# Altium PCB VCA.PcbDoc
Units mil, origin at the board's own origin, x right, y up, seen from the top; angles counter-clockwise.
Board outline 9025 x 4445 mil, 2 copper layers (Top Layer, Bottom Layer), stack 61.811 mil thick; 28 components, 20 nets, 85 pads, 5 vias.
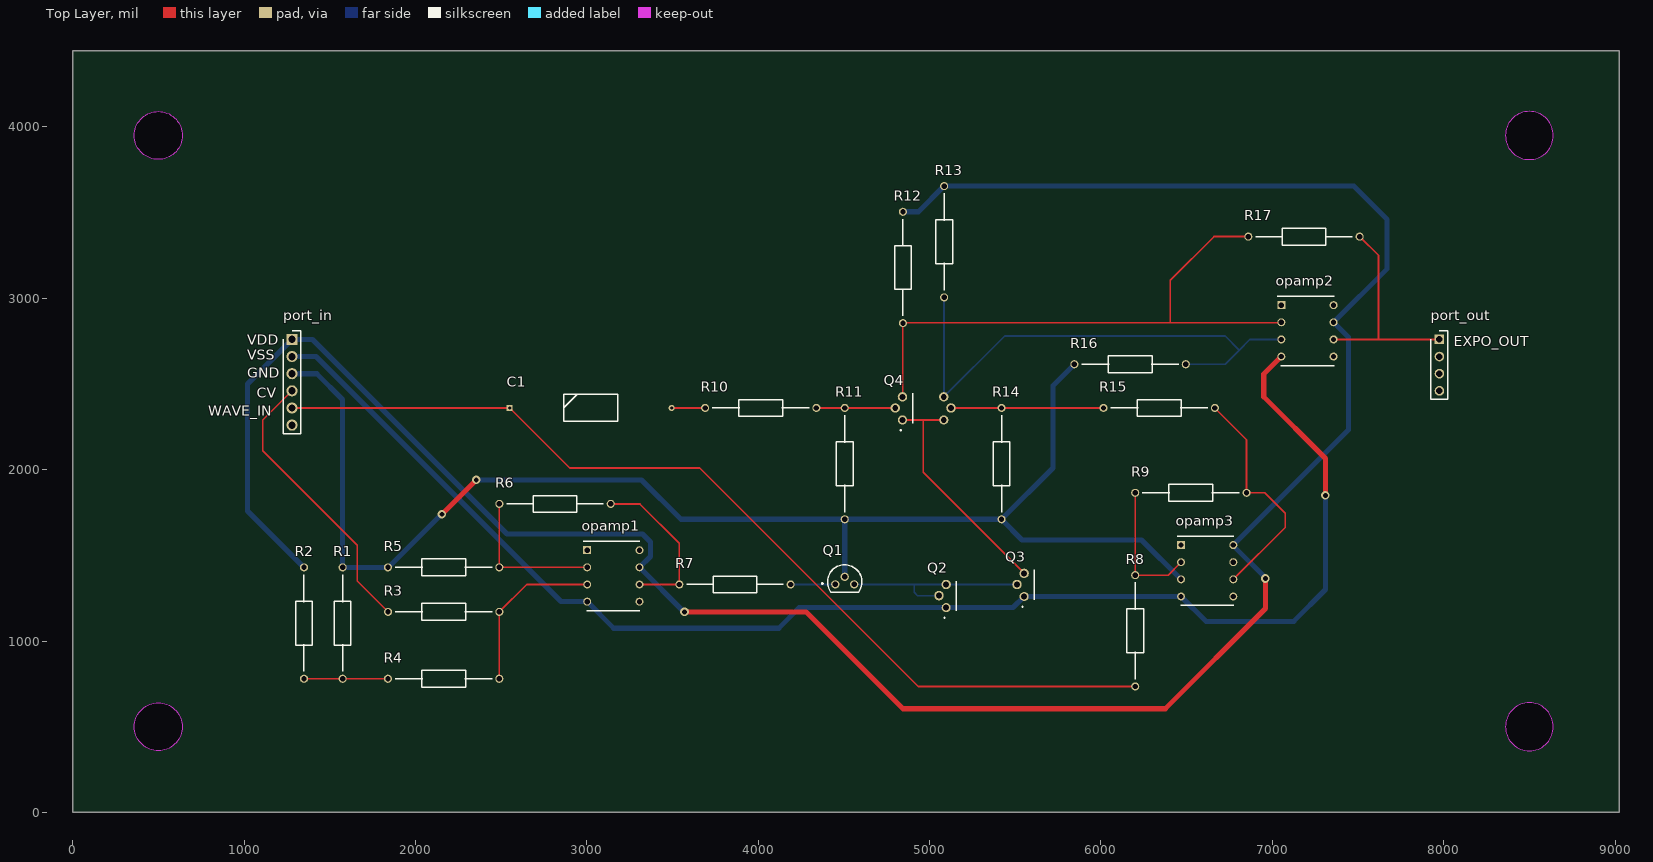
[diagram p0: Top Layer view]
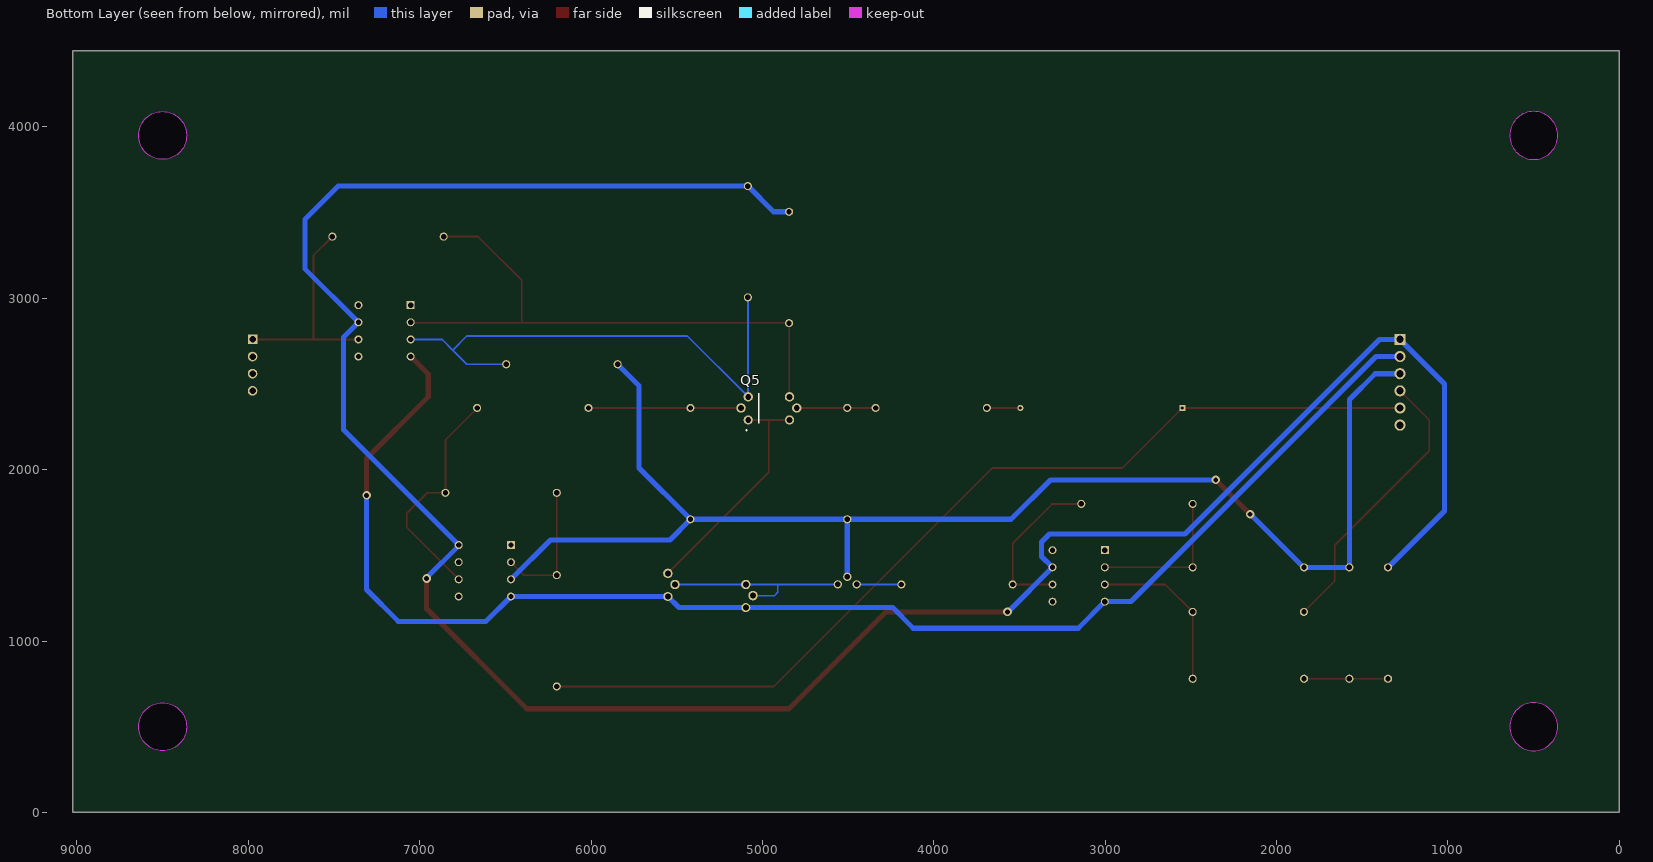
[diagram p1: Bottom Layer view, seen from below]
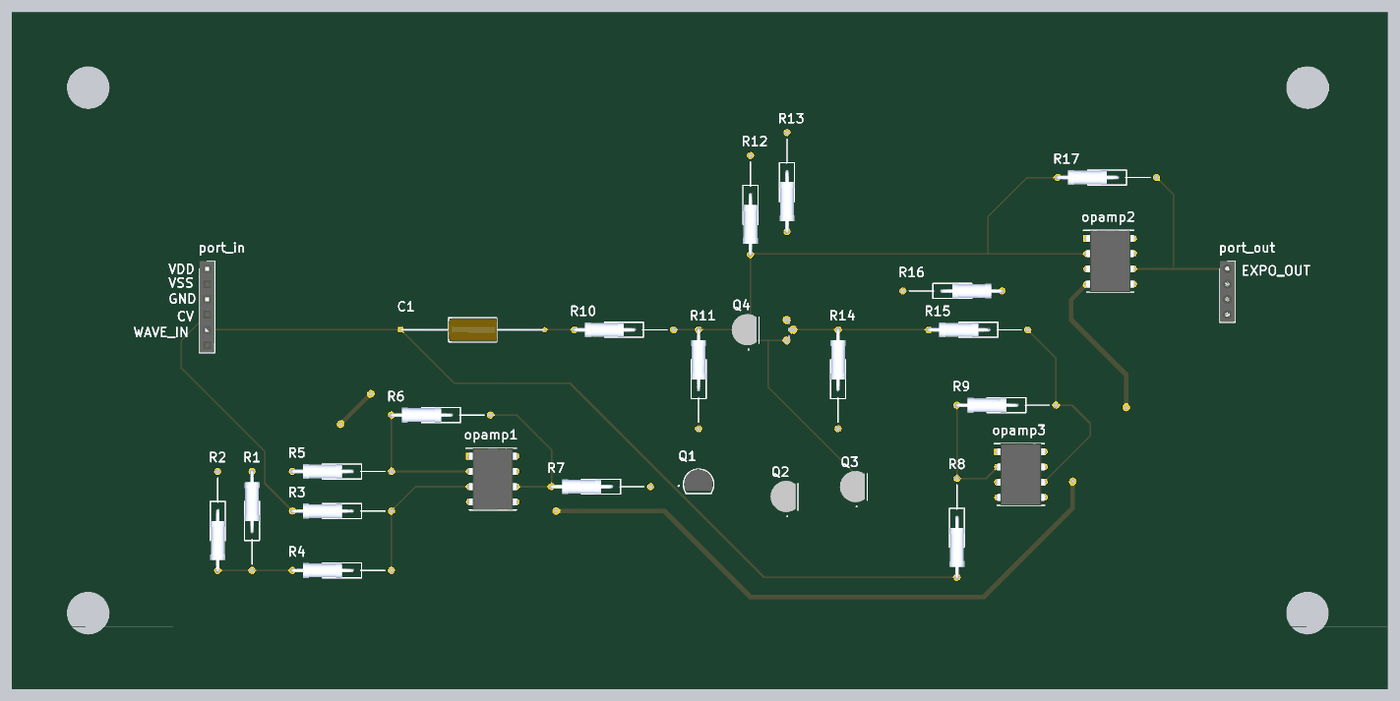
[diagram p2: 3D render of the assembled board from above, using the file's embedded part models]

## Layer stack, top to bottom
Top Solder: solder mask 0.5, Solder Resist, Dk 3.5
Top Layer: signal copper 1.378
Dielectric 1: dielectric 59.055, FR-4, Dk 4.5
Bottom Layer: signal copper 1.378
Bottom Solder: solder mask 0.5, Solder Resist, Dk 3.5

## Board outline
0,0 0,4445 9025,4445 9025,0
cut-out: 8360,3950 ccw(c8500,3950) 8500,3810 ccw(c8500,3950) 8640,3950 ccw(c8500,3950) 8500,4090 ccw(c8500,3950)
cut-out: 8360,500 ccw(c8500,500) 8500,360 ccw(c8500,500) 8640,500 ccw(c8500,500) 8500,640 ccw(c8500,500)
cut-out: 500,360 cw(c500,500) 360,500 cw(c500,500) 500,640 cw(c500,500) 640,500 cw(c500,500)
cut-out: 500,3810 cw(c500,3950) 360,3950 cw(c500,3950) 500,4090 cw(c500,3950) 640,3950 cw(c500,3950)

## Design rules (kind name [scope] priority, off if disabled: settings)
Clearance [All] p1: gap=10 ignorepadtopadclearanceinfootprint=FALSE
PolygonConnect [All] p1: connectstyle=Relief reliefconductorwidth=10 reliefentries=4 polygonreliefangle="90 Angle" airgapwidth=10
RoutingVias [All] p1: holewidth=28 width=50 viastyle="Through Hole" minholewidth=28 minwidth=50 maxholewidth=28 maxwidth=50
SolderMaskExpansion [All] p1: expansion=4 istentingtop=FALSE
SupplyNets "Schematic Supply Nets_2" [InNet('GND')] p1: voltage=0.000
SupplyNets "Schematic Supply Nets_1" [InNet('VSS')] p2: voltage=0.000
SupplyNets "Schematic Supply Nets" [InNet('VDD')] p3: voltage=0.000
Width [All] p1: maxlimit=30 minlimit=10 preferedwidth=10 minimp=50.000000 maximp=50.000000 favimp=50.000000
30 further rules are at their usual default settings.

## Components (designator, comment, footprint, x,y, rotation, side; value= is the part's Value field where it differs from the comment)
C1 "100n" CAPPA2400W30L800D400 2550.12,2360 r0 top
opamp1 "OP27AZ" DIP775W58P254L1029H508Q8N 3155,1380 r0 top
opamp2 "OP27AZ" DIP775W58P254L1029H508Q8N 7205,2810 r0 top
opamp3 "OP27AZ" DIP775W58P254L1029H508Q8N 6620,1410 r0 top
port_in "929870-01-06-RA" RHDR6W64P0X254_1X6_1524X254X380P 1280,2760 r270 top
port_out "929870-01-04-RA" RHDR4W76P0X254_1X4_1016X254X826P 7975,2760 r270 top
Q1 "2N3906" 2N5457 4455,1335.63 r0 top
Q2 "2N3904" CS_TO-92 4992.01,1265 r90 top
Q3 "2N3904" CS_TO-92 5447.01,1330 r90 top
Q4 "2N3904" CS_TO-92 4737.01,2360 r90 top
Q5 "2N3904" CS_TO-92 5187.99,2360 r90 bottom
R1 "280" RESAD1650W60L650D250 1575,1429.61 r270 top
R2 "10k" RESAD1650W60L650D250 1350,780 r90 top
R3 "10k" RESAD1650W60L650D250 1840.39,1170 r0 top
R4 "10k" RESAD1650W60L650D250 1840,780 r0 top
R5 "10k" RESAD1650W60L650D250 1840,1430 r0 top
R6 "10k" RESAD1650W60L650D250 2490,1800 r0 top
R7 "8k" RESAD1650W60L650D250 3540,1330 r0 top
R8 "10k" RESAD1650W60L650D250 6200,735 r90 top
R9 "10k" RESAD1650W60L650D250 6200,1865 r0 top
R10 "100k" RESAD1650W60L650D250 3690.39,2360 r0 top
R11 "470" RESAD1650W60L650D250 4505,2360 r270 top
R12 "47k" RESAD1650W60L650D250 4845,2855 r90 top
R13 "47k" RESAD1650W60L650D250 5085,3005 r90 top
R14 "470" RESAD1650W60L650D250 5420,2360 r270 top
R15 "100k" RESAD1650W60L650D250 6015,2360 r0 top
R16 "47k" RESAD1650W60L650D250 6495,2615 r180 top
R17 "47k" RESAD1650W60L650D250 6860,3360 r0 top

## Footprints (in the part's own frame and the unit in brackets; to place one, negate y for a bottom-side part, rotate by r counter-clockwise, add the part's x,y. Pads: shape width x height; smd on the part's side, far side on the other; paste and mask are expansions set on the pad)
2N5457 [mm]
  round 1.23 hole 0.8: 1(-0.127,-0.127) 2(1.27,1) 3(2.667,-0.127)
  silkscreen extent -2.13,-1.3 3.81,2.79, body extent -1.14,-0.88 3.68,2.8, height 7.44
CAPPA2400W30L800D400 [mm]
  rect 0.9x0.9 hole 0.5: 1(0,0)
  round 0.9 hole 0.5: 2(24,0)
  silkscreen extent 8,-2 16,2, body extent -0.15,-2 24.15,2, height 3.99
CS_TO-92 [mm]
  round 1.35 hole 0.88: 1(-1.778,-2.667)
  round 1.4 hole 0.88: 2(0,-1.6) 3(1.651,-2.667)
  silkscreen extent -3.36,-4.19 2.16,-2.35, body extent -2.59,-3.81 2.63,0.37, height 5.56
DIP775W58P254L1029H508Q8N [mm]
  rect 1.18x1.18 hole 0.78: 1(-3.875,3.81)
  round 1.18 hole 0.78: 2(-3.875,1.27) 3(-3.875,-1.27) 4(-3.875,-3.81) 5(3.875,-3.81) 6(3.875,-1.27) 7(3.875,1.27) 8(3.875,3.81)
  silkscreen extent -4.46,-5.15 3.94,5.15, body extent -4.02,-5.15 4.02,5.15, height 5.08
RESAD1650W60L650D250 [mm]
  round 1.2 hole 0.8: 1(0,0) 2(16.5,0)
  silkscreen extent 1.08,-1.25 15.42,1.25, body extent -0.3,-1.25 10.3,1.25, height 2.55
RHDR4W76P0X254_1X4_1016X254X826P [mm]
  rect 1.425x1.425 hole 0.95: 1(0,0)
  round 1.425 hole 0.95: 2(2.54,0) 3(5.08,0) 4(7.62,0)
  silkscreen extent -1.27,-1.27 8.89,1.27, body extent -1.27,-1.27 8.89,1.27, height 8.26
RHDR6W64P0X254_1X6_1524X254X380P [mm]
  rect 1.65x1.65 hole 1.1: 1(0,0)
  round 1.65 hole 1.1: 2(2.54,0) 3(5.08,0) 4(7.62,0) 5(10.16,0) 6(12.7,0)
  silkscreen extent -1.27,-1.27 13.97,1.27, body extent -1.27,-1.27 13.97,1.27, height 3.8

## Part data
C1: library part 0113207, "Capacitor", Manufacturer_Name="RS Pro", Datasheet Link=https://docs.rs-online.com/d68c/0900766b8157e121.pdf, Manufacturer_Part_Number=0113207
opamp1 opamp2 opamp3: "Integrated Circuit", Manufacturer_Name="Analog Devices", Mouser Part Number=700-OP27AZNR, Arrow Part Number=OP27AZ, Arrow Price/Stock=https://www.arrow.com/en/products/op27az/analog-devices, Datasheet Link=https://www.analog.com/media/en/technical-documentation/data-sheets/OP27.pdf, Height=5.08mm, Manufacturer_Part_Number=OP27AZ, Mouser Price/Stock=https://www.mouser.co.uk/ProductDetail/Maxim-Integrated/OP27AZ?qs=7RslVrYcaDTFV9h3XrpsTA%3D%3D
port_in: "Connector", Manufacturer_Name=3M, Mouser Part Number=517-929870-01-06-RA, Arrow Part Number=929870-01-06-RA, Arrow Price/Stock=https://www.arrow.com/en/products/929870-01-06-ra/3m?region=nac, Datasheet Link=https://componentsearchengine.com/Datasheets/1/929870-01-06-RA.pdf, Height=3.8mm, Manufacturer_Part_Number=929870-01-06-RA, Mouser Price/Stock=https://www.mouser.co.uk/ProductDetail/3M-Electronic-Solutions-Division/929870-01-06-RA?qs=neFkstNq%252B6F6Q7pF8hOFFA%3D%3D
port_out: "Connector", Manufacturer_Name=3M, Mouser Part Number=517-929870-01-04-RA, Arrow Part Number=929870-01-04-RA, Arrow Price/Stock=https://www.arrow.com/en/products/929870-01-04-ra/3m, Datasheet Link=https://componentsearchengine.com/Datasheets/2/929870-01-04-RA.pdf, Height=8.26mm, Manufacturer_Part_Number=929870-01-04-RA, Mouser Price/Stock=https://www.mouser.co.uk/ProductDetail/3M-Electronic-Solutions-Division/929870-01-04-RA?qs=neFkstNq%252B6GPZEKactAgTg%3D%3D
Q1: "Transistor BJT PNP", Manufacturer_Name="Central Semiconductor", Mouser Part Number=610-2N3906, Arrow Part Number=2N3906, Arrow Price/Stock=https://www.arrow.com/en/products/2n3906/central-semiconductor?region=nac, Datasheet Link=http://www.mouser.com/datasheet/2/68/2n3905-29545.pdf, Height=5.33mm, Manufacturer_Part_Number=2N3906, Mouser Price/Stock=https://www.mouser.com/Search/Refine.aspx?Keyword=610-2N3906
Q2 Q3 Q4 Q5: "Transistor BJT NPN", Manufacturer_Name="Central Semiconductor", Mouser Part Number=610-2N3904, Datasheet Link=https://my.centralsemi.com/get_document.php?cmp=1&mergetype=pd&mergepath=pd&pdf_id=2N3903.PDF, Manufacturer_Part_Number=2N3904, Mouser Price/Stock=https://www.mouser.com/Search/Refine.aspx?Keyword=610-2N3904
R1 R2 R3 R4 R5 R6 R7 R8 R9 R10 R11 R12 R13 R14 R15 R16 R17: library part MRS25000C1003FC100, "Resistor", Manufacturer_Name=Vishay, Mouser Part Number=594-MRS25000C1003FC1, Arrow Part Number=MRS25000C1003FC100, Arrow Price/Stock=https://www.arrow.com/en/products/mrs25000c1003fc100/vishay?region=nac, Datasheet Link=http://www.vishay.com/docs/28724/mrs16m25.pdf, Manufacturer_Part_Number=MRS25000C1003FC100, Mouser Price/Stock=https://www.mouser.co.uk/ProductDetail/Vishay-BC-Components/MRS25000C1003FC100?qs=H30XFsNYD%2FHyk6mBpuomxg%3D%3D

## Via types
v1: diameter 50, hole 28, Top Layer to Bottom Layer, 5 vias

## Nets (pads, with @x,y where several pads share a name; then routed paths per layer and width w, separated by ;. In a path a pad name is that pad's centre, name@x,y a point inside that pad or via, vN(x,y) a via of type N, cw(c..) or ccw(c..) an arc to the next point about the centre after c; other vN are vias at no path point)
GND: opamp3.3 port_in.3 Q1.2 R1.1 R5.1 R11.2 R14.2 R16.2 | length 8097.8
  Top Layer w30: v1(2155,1740) v1(2355,1940)
  Bottom Layer w10: R1.1 R1.1@1575.2,1429.8 ; R5.1@1839.8,1429.8 R5.1 R5.1@1842.5,1430 ; v1@2152.5,1740 v1(2155,1740)
  Bottom Layer w30: port_in.3 1425,2560 1575,2410 R1.1 ; R1.1@1575.2,1429.8 R5.1@1839.8,1429.8 ; R5.1@1842.5,1430 v1@2152.5,1740 ; v1(2355,1940) 3320,1940 3549.61,1710.39 R11.2 ; Q1.2 R11.2 ; R16.2 5720,2489.61 5720,2010.39 R14.2 ; opamp3.3 6237.05,1590.39 5540,1590.39 R14.2 ; R11.2 R14.2
NetC1_1: C1.1 port_in.5 R8.1 | length 5593.1
  Top Layer w10: port_in.5 C1.1 2900.06,2010.06 3659.94,2010.06 4935,735 R8.1
NetC1_2: C1.2 R10.1 | length 195.4
  Top Layer w10: C1.2 R10.1
Netopamp1_2: opamp1.2 R5.2 R6.1 | length 883
  Top Layer w10: R6.1 2489.8,1799.8 2489.8,1430.2 R5.2 opamp1.2
Netopamp1_3: opamp1.3 R3.2 R4.2 | length 968.9
  Top Layer w10: R4.2 2489.8,780.2 2489.8,1169.8 R3.2 2650,1330 opamp1.3
Netopamp1_6: opamp1.6 R6.2 R7.1 | length 968.1
  Top Layer w10: R6.2 3310,1800 3540,1570 R7.1 opamp1.6
Netopamp2_2: opamp2.2 Q4.3 R12.1 R17.1 | length 3448.9
  Top Layer w10: Q4.3 4843.5,2426.5 4843.5,2853.5 R12.1 4847.5,2857.5 6405,2857.5 ; R17.1 6660,3360 6405,3105 6405,2857.5 ; opamp2.2 7049.94,2857.5 6405,2857.5
Netopamp2_3: opamp2.3 Q5.3 R13.1 R16.1 | length 3104.1
  Bottom Layer w10: R13.1 5084,3004 5084,2426 Q5.3 5437.99,2780 6725,2780 6807.5,2697.5 ; R16.1 6725,2615 6807.5,2697.5 ; opamp2.3 6870,2760 6807.5,2697.5
Netopamp2_6: opamp2.6 port_out.1 R17.2 | length 1263.2
  Top Layer w10: opamp2.6 7620,2760 ; R17.2 7620,3249.61 7620,2760 ; port_out.1 7620,2760
Netopamp3_2: opamp3.2 R8.2 R9.1 | length 779.1
  Top Layer w10: R9.1 R8.2 6392.05,1384.61 opamp3.2
Netopamp3_6: opamp3.6 R9.2 R15.2 | length 1357
  Top Layer w10: R15.2 6849.61,2175 R9.2 6955,1865 7075,1745 7075,1662.44 opamp3.6
Netport_in_4: port_in.4 R3.1 | length 1663
  Top Layer w10: port_in.4 1110,2290 1110,2110 1660,1560 1660,1350.39 R3.1
NetQ1_1: Q1.1 R7.2 | length 261.5
  Top Layer w10: R7.2 R7.2@4189.92,1330.32 ; Q1.1@4449.69,1330.32 Q1.1
  Bottom Layer w10: R7.2 4189.92,1330.32 4449.69,1330.32 Q1.1
NetQ1_3: Q1.3 Q2.2 Q2.3 Q3.2 | length 1149.3
  Top Layer w10: Q1.3 Q1.3@4560.31,1330.32
  Bottom Layer w10: Q1.3 4560.31,1330.32 4910,1330.32 ; Q2.2 4930,1265 4910,1285 4910,1330.32 ; Q3.2 Q2.3 5096.69,1330.32 4910,1330.32
NetQ3_3: Q3.3 Q4.1 Q5.1 | length 1380.2
  Top Layer w10: Q4.1 4962.5,2290 ; Q5.1 4962.5,2290 ; Q3.3 4962.5,1984.51 4962.5,2290
NetQ4_2: Q4.2 R10.2 R11.1 | length 460
  Top Layer w10: R10.2 R11.1 Q4.2
NetQ5_2: Q5.2 R14.1 R15.1 | length 890
  Top Layer w10: Q5.2 R14.1 R15.1
NetR1_2: R1.2 R2.1 R4.1 | length 490
  Top Layer w10: R2.1 R1.2 R4.1
VDD: opamp1.7 opamp2.7 opamp3.8 port_in.1 R2.2 R12.2 R13.2 | length 14326.5
  Top Layer w30: v1(3570,1170) 4280,1170 4845,605 6375,605 6960,1190 v1(6960,1365)
  Bottom Layer w10: v1@3567.56,1170 v1(3570,1170) ; opamp3.8@6772.56,1556.22 opamp3.8 ; v1(6960,1365) v1@6960,1368.78
  Bottom Layer w30: R2.2 1020,1759.61 1020,2500 port_in.1 1400,2760 2535,1625 3325,1625 3371.28,1578.72 3371.28,1493.72 opamp1.7 v1@3567.56,1170 ; R12.2 4935,3504.61 R13.2 7475.39,3654.61 7670,3460 7670,3172.44 opamp2.7 7445,2772.56 7445,2232.44 opamp3.8 ; opamp3.8@6772.56,1556.22 v1@6960,1368.78
VSS: opamp1.4 opamp2.4 opamp3.4 port_in.2 Q2.1 Q3.1 | length 8451.4
  Top Layer w30: opamp2.4 6950,2557.56 6950,2425 7310,2065 v1(7310,1850)
  Bottom Layer w30: port_in.2 1420,2660 2850,1230 opamp1.4 3157.44,1075 4120,1075 4240,1195 Q2.1 5487.01,1195 Q3.1 opamp3.4 6612.44,1115 7125,1115 7310,1300 v1(7310,1850)
pads on no net: opamp1.1 opamp1.5 opamp1.8 opamp2.1 opamp2.5 opamp2.8 opamp3.1 opamp3.5 opamp3.7 port_in.6 port_out.2 port_out.3 port_out.4

## Silkscreen, mask and mechanical layers (free items; w line width, h text height)
Top Overlay:
  text "VDD" at 1020,2730 h60
  text "EXPO_OUT" at 8060,2720 h60
  text "VSS" at 1020,2640 h60
  text "GND" at 1020,2535 h60
  text "CV" at 1075,2420 h60
  text "WAVE_IN" at 790,2315 h60
Mechanical 1:
  circle w10: c8500,500 r140
  circle w10: c8500,3950 r140
  circle w10: c500,500 r140
  circle w10: c500,3950 r140
  pour cut-out: 8360,3950 ccw(c8500,3950) 8500,3810 ccw(c8500,3950) 8640,3950 ccw(c8500,3950) 8500,4090 ccw(c8500,3950)
  pour cut-out: 500,3810 cw(c500,3950) 360,3950 cw(c500,3950) 500,4090 cw(c500,3950) 640,3950 cw(c500,3950)
  lines w10: 0,0 9025,0 9025,4445 0,4445 0,0